# EAGLE board rcp2pads (EAGLE 9.6.2)
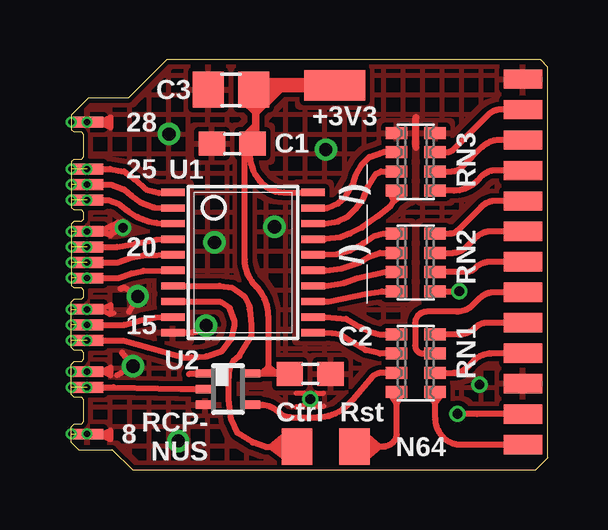
[diagram p0: board, top side]
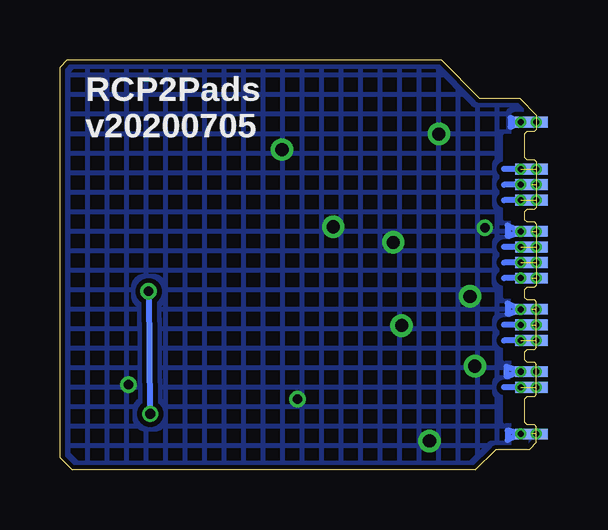
[diagram p1: board, bottom side, seen from below]

Size 19.85 x 17.1 mm. Coordinates in mm from the lower left corner, seen from the top.
Outline: 0,1.15 0.3,0.85 1.7,0.85 2.55,0 19.35,0 19.85,0.5 19.85,16.8 19.55,17.1 3.98,17.1 2.38,15.5 0.7,15.5 0,14.8 0,14.2 0.1,14.1 0.4,14.1 0.5,14 0.5,13.05 0.4,12.95 0.1,12.95 0,12.85 0,10.95 0.1,10.85 0.4,10.85 0.5,10.75 0.5,10.45 0.4,10.35 0.1,10.35 0,10.25 0,7.7 0.1,7.6 0.4,7.6 0.5,7.5 0.5,7.2 0.4,7.1 0.1,7.1 0,7 0,5.1 0.1,5 0.4,5 0.5,4.9 0.5,4.6 0.4,4.5 0.1,4.5 0,4.4 0,3.15 0.1,3.05 0.4,3.05 0.5,2.95 0.5,2 0.4,1.9 0.1,1.9 0,1.8 0,1.15
Copper layers (1*16): Top 0.018mm / dielectric 1.55mm / Bottom 0.018mm
Design rules "fpc": minimum track width 0.1mm, minimum drill 0.2mm, track to track 0.2mm, track to pad 0.2mm, pad to pad 0.2mm, via to via 0.2mm, smd to smd 0mil, copper to edge 0.2mm, drill to drill 0.2mm, minimum pad ring 0.125mm, minimum via ring 0.1mm, stop-mask expansion 2mil, vias tented up to drill 1mm, thermal gap 0.2mm
bRestrict: area -0.4,10.4 to 1.3,14; area -0.4,7.2 to 1.3,9.5; area -0.4,4.6 to 1.3,6.2; area -0.4,2 to 1.3,3.6

## Footprints (pad centres in the part's own frame; a part is rotated, then mirrored left to right if it is on the bottom)
C0603 = smd 1.1 x 1: 1 -0.85,0; 2 0.85,0
C0805 = smd 1.3 x 1.5: 1 -0.95,0; 2 0.95,0
SMD0.8SQ = smd 1.27 x 1.524: P$1 0,0
SMD0,45-1,35 = smd 1.35 x 0.45: P$1 0,0
SMD0,8-1,6 = smd 0.8 x 1.6: 1 0,0
SMD1,27-2,54 = smd 1.27 x 2.54: 1 0,0
CTS742C083 = smd 0.5 x 0.9: 1 -1.2,-0.8; 2 -0.4,-0.8; 3 0.4,-0.8; 4 1.2,-0.8; 5 1.2,0.8; 6 0.4,0.8; 7 -0.4,0.8; 8 -1.2,0.8
TSSOP20 = smd 0.305 x 0.991: 1 -2.925,-2.918; 2 -2.275,-2.918; 3 -1.625,-2.918; 4 -0.975,-2.918; 5 -0.325,-2.918; 6 0.325,-2.918; 7 0.975,-2.918; 8 1.625,-2.918; 9 2.275,-2.918; 10 2.925,-2.918; 11 2.925,2.918; 12 2.275,2.918; 13 1.625,2.918; 14 0.975,2.918; 15 0.325,2.918; 16 -0.325,2.918; 17 -0.975,2.918; 18 -1.625,2.918; 19 -2.275,2.918; 20 -2.925,2.918
DCK_R-PDSO-G5 = smd 0.35 x 0.8: 1 -0.65,-0.95; 2 0,-0.95; 3 0.65,-0.95; 4 0.65,0.95; 5 -0.65,0.95

## Placement (x,y rotation side)
C1  0.1u  [C0603]  6.7,13.6 180 top
C2  0.1u  [C0603]  9.95,4 0 top
C3  22u  [C0805]  6.65,15.85 180 top
E$2  [SMD0.8SQ]  9.4,0.98 0 top
E$6  [SMD0.8SQ]  11.8,0.98 0 top
E$8  [SMD0,45-1,35]  0.65,3.45 0 top
E$9  [SMD0,45-1,35]  0.65,4.1 0 top
E$10  [SMD0,45-1,35]  0.65,5.4 0 top
E$11  [SMD0,45-1,35]  0.65,6.05 0 top
E$12  [SMD0,45-1,35]  0.65,6.7 0 top
E$13  [SMD0,45-1,35]  0.65,8 0 top
E$14  [SMD0,45-1,35]  0.65,8.65 0 top
E$15  [SMD0,45-1,35]  0.65,9.3 0 top
E$16  [SMD0,45-1,35]  0.65,9.95 0 top
E$17  [SMD0,45-1,35]  0.65,11.25 0 top
E$18  [SMD0,45-1,35]  0.65,11.9 0 top
E$19  [SMD0,45-1,35]  0.65,12.55 0 top
E$20  [SMD0,8-1,6]  18.81,15.03 90 top
E$21  [SMD0,8-1,6]  18.81,16.3 90 top
E$22  [SMD0,45-1,35]  0.2,12.55 0 bottom
E$23  [SMD0,45-1,35]  0.2,11.9 0 bottom
E$24  [SMD0,45-1,35]  0.2,11.25 0 bottom
E$25  [SMD0,45-1,35]  0.2,9.95 0 bottom
E$26  [SMD0,45-1,35]  0.2,9.3 0 bottom
E$27  [SMD0,45-1,35]  0.2,8.65 0 bottom
E$28  [SMD0,45-1,35]  0.2,8 0 bottom
E$29  [SMD0,45-1,35]  0.2,6.7 0 bottom
E$30  [SMD0,45-1,35]  0.2,6.05 0 bottom
E$31  [SMD0,45-1,35]  0.2,5.4 0 bottom
E$32  [SMD0,45-1,35]  0.2,4.1 0 bottom
E$33  [SMD0,45-1,35]  0.2,3.45 0 bottom
E$36  [SMD0,8-1,6]  18.81,13.76 90 top
E$39  [SMD0,8-1,6]  18.81,12.49 90 top
E$43  [SMD0,45-1,35]  0.2,1.5 0 bottom
E$46  [SMD0,45-1,35]  0.65,14.5 0 top
E$47  [SMD0,45-1,35]  0.2,14.5 0 bottom
E$48  [SMD0,8-1,6]  18.81,11.22 90 top
E$49  [SMD0,8-1,6]  18.81,9.95 90 top
E$50  [SMD0,8-1,6]  18.81,8.68 90 top
E$51  [SMD0,8-1,6]  18.81,7.41 90 top
E$53  [SMD0,8-1,6]  18.81,6.14 90 top
E$54  [SMD0,8-1,6]  18.81,4.87 90 top
E$55  [SMD0,8-1,6]  18.81,3.6 90 top
E$56  [SMD0,8-1,6]  18.81,2.33 90 top
E$57  [SMD0,8-1,6]  18.81,1.06 90 top
GND  [SMD0,45-1,35]  0.65,1.5 0 top
P_VCC_3V3  [SMD1,27-2,54]  10.96,16.04 90 top
RN1  [CTS742C083]  14.35,4.45 270 top
RN2  [CTS742C083]  14.35,8.65 270 top
RN3  [CTS742C083]  14.35,12.85 270 top
U1  74VHC9151FT  [TSSOP20]  7.15,8.65 270 top
U2  SN74LVC1G17DCKR  [DCK_R-PDSO-G5]  6.53,3.38 270 top

## Library data of the parts
C1-C3 = rcl
E$2 E$6 E$8-E$33 E$36 E$39 E$43 E$46-E$51 E$53-E$57 GND = wirepad
P_VCC_3V3 = wirepad@1
RN1-RN3 = resistor-net
U1 = sipex
U2 = texas

## Nets
3V3: C1.1 C2.1 C3.1 P_VCC_3V3.1 U1.20 U2.5
#DSYNC: E$10.P$1 E$31.P$1 U1.8
#DSYNC.1: E$53.1 RN1.8
CTRL: E$2.P$1 U1.7
CTRL.1: E$56.1 RN2.5
D0: E$19.P$1 E$22.P$1 U1.1
D0.1: E$20.1 RN3.7
D1: E$18.P$1 E$23.P$1 U1.2
D1.1: E$36.1 RN3.6
D2: E$17.P$1 E$24.P$1 U1.3
D2.1: E$39.1 RN3.5
D3: E$15.P$1 E$26.P$1 U1.4
D3.1: E$48.1 RN2.8
D4: E$14.P$1 E$27.P$1 U1.5
D4.1: E$49.1 RN2.7
D5: E$13.P$1 E$28.P$1 U1.6
D5.1: E$50.1 RN2.6
D6: E$11.P$1 E$30.P$1 U1.9
D6.1: E$51.1 RN1.7
GND: C1.2 C2.2 C3.2 E$9.P$1 E$12.P$1 E$16.P$1 E$21.1 E$25.P$1 E$29.P$1 E$32.P$1 E$43.P$1 E$46.P$1 E$55.1 GND.P$1 RN3.1 RN3.8 U1.10 U2.3
RST: E$6.P$1 RN1.4
RST.1: E$57.1 RN1.5
S$1: RN3.2 U1.19
S$2: RN3.3 U1.18
S$3: RN3.4 U1.17
S$4: RN2.1 U1.16
S$6: RN2.2 U1.15
S$7: RN2.3 U1.14
S$9: RN1.1 U1.12
S$10: RN2.4 U1.13
S$11: RN1.3 U2.4
S$12: RN1.2 U1.11
VCLK: E$8.P$1 E$33.P$1 U2.2
VCLK.1: E$54.1 RN1.6

## Tracks (layer width: path | path; a pad name or v marks a point on that pad's centre or on a via)
3V3
  Top 0.254: C3.1 7.65,15.85 8.05,15.45 8.05,15.23 7.67,14.85 | C3.1 7.6,15.45 | 7.67,14.85 7.67,15.67 arc45 C3.1 | C1.1 7.42,13.24 arc45 7.95,11.95 arc45 8.86,11.57 U1.20 | 7.67,14.85 7.1,15.42 7.1,15.5 | 7.22,13.23 7.22,8.8 arc45 7.7,7.65 arc-45 8.2,6.44 8.2,4.3 | U2.5 7.9,4.03 | 7.9,4.03 8.2,4.03 | 8.2,4.03 8.55,4.03 | 8.55,4.03 9.07,4.03 C2.1 | 8.2,4.03 8.2,4.3 | 8.2,4.3 7.9,4.03 | 8.2,4.3 8.55,4.03
  Top 0.305: 7.67,14.85 7.67,14.35 | 7.67,14.35 7.67,13.72 C1.1 7.55,13.3 7.22,13.23 | 7.67,14.35 7.27,13.95 7.15,13.95
  Top 0.61: P_VCC_3V3.1 7.79,16.04 C3.1 | 8.05,15.45 8.65,16.05
#DSYNC  (via drill 0.25)  (2 unrouted)
  Top 0.254: E$10.P$1 2.15,5.4 3.2,5.1 4.65,4.7 5,4.7 5.63,4.74 6.28,4.97 6.68,5.5 6.8,6.03 6.8,6.19 6.6,6.75 6.22,7 4.26,7 U1.8
  Bottom 0.254: E$31.P$1 1.34,5.4
  other vias: 0.65,5.4 0,5.4
#DSYNC.1
  Top 0.254: E$53.1 17.31,6.14 arc45 16.85,5.95 arc-45 16.13,5.65 RN1.8
CTRL
  Top 0.254: E$2.P$1 8.75,0.98 | 8.3,0.98 8.75,0.98 | 8.3,0.98 8.07,0.98 7.55,1.15 6.9,1.55 6.65,2.1 6.55,2.95 6.55,3.65 6.6,4.25 6.75,4.55 7,4.75 7.5,5.57 7.5,6.05 7.43,6.71 7.4,6.85 7.2,7.25 6.7,7.6 6.17,7.67 U1.7 | 8.3,0.98 8.81,1.38 | 8.81,1.38 9.1,1.6 | 8.3,0.98 8.81,0.58 | 8.81,0.58 9.05,0.4 | 8.75,0.98 8.81,1.38 | 8.75,0.98 8.81,0.58
CTRL.1  (via drill 0.4)
  Top 0.254: RN2.5 v16.16,7.45 | v16.09,2.34 16.9,2.33 E$56.1
  Bottom 0.254: v16.16,7.45 arc-45 16.14,7.44 v16.09,2.34
D0  (via drill 0.25)  (2 unrouted)
  Top 0.254: E$19.P$1 1.6,12.55 2.2,12.45 2.65,12.1 3.1,11.7 3.45,11.6 3.65,11.55 U1.1
  Bottom 0.254: E$22.P$1 1.34,12.55
  other vias: 0.65,12.55 0,12.55
D0.1
  Top 0.254: RN3.7 15.65,13.25 arc45 15.91,13.36 17.37,14.82 arc-45 17.88,15.03 E$20.1
D1  (via drill 0.25)  (1 unrouted)
  Top 0.254: E$18.P$1 1.65,11.9 2.2,11.7 2.5,11.45 2.9,11.15 3.45,10.95 U1.2
  Bottom 0.127: E$23.P$1 E$18.P$1
  Bottom 0.254: E$23.P$1 1.34,11.9
  other vias: 0.65,11.9 0,11.9
D1.1
  Top 0.254: E$36.1 17.81,13.76 arc45 17.13,13.48 16.28,12.63 arc-45 15.85,12.45 RN3.6
D2  (via drill 0.25)  (2 unrouted)
  Top 0.254: E$17.P$1 1.55,11.25 1.95,11.1 2.35,10.8 2.75,10.55 3.25,10.35 3.55,10.3 U1.3
  Bottom 0.254: E$24.P$1 1.35,11.25
  other vias: 0.65,11.25 0,11.25
D2.1
  Top 0.254: E$39.1 17.64,12.49 arc45 17.13,12.28 16.9,12.05 arc-45 15.93,11.65 RN3.5
D3  (via drill 0.25)  (2 unrouted)
  Top 0.254: E$15.P$1 1.9,9.3 2.7,9.45 3.55,9.6 U1.4
  Bottom 0.254: E$26.P$1 1.35,9.3
  other vias: 0.65,9.3 0,9.3
D3.1
  Top 0.254: E$48.1 17.67,11.22 arc45 17.07,10.97 16.09,9.99 arc-45 15.75,9.85 RN2.8
D4  (via drill 0.25)  (2 unrouted)
  Top 0.254: E$14.P$1 1.9,8.65 2.5,8.85 3,8.95 U1.5
  Bottom 0.254: E$27.P$1 1.34,8.65
  other vias: 0.65,8.65 0,8.65
D4.1
  Top 0.254: E$49.1 17.5,9.95 arc45 16.82,9.67 16.41,9.26 arc-45 15.9,9.05 RN2.7
D5  (via drill 0.25)  (1 unrouted)
  Top 0.254: E$13.P$1 1.95,8 2.5,8.2 3,8.3 U1.6
  Bottom 0.127: E$28.P$1 E$13.P$1
  Bottom 0.254: E$28.P$1 1.36,8
  other vias: 0.65,8 0,8
D5.1
  Top 0.254: E$50.1 17.48,8.68 arc45 16.8,8.4 arc-45 16.44,8.25 RN2.6
D6  (via drill 0.25)  (1 unrouted)
  Top 0.254: E$11.P$1 2.2,6.05 2.95,6.25 3.5,6.35 U1.9
  Bottom 0.127: E$30.P$1 E$11.P$1
  Bottom 0.254: E$30.P$1 1.35,6.05
  other vias: 0.65,6.05 0,6.05
D6.1
  Top 0.254: E$51.1 17.61,7.41 arc45 17.01,7.16 16.73,6.88 arc-45 16.05,6.6 14.8,6.6 arc90 14.33,6.13 14.33,5.17 arc90 14.65,4.85 RN1.7
GND  (via drill 0.25, 0.4, 0.55)  (3 unrouted)
  Top 0.203: 1.65,6.49 1.65,6.9 1.2,6.7 1.65,6.49 | 1.65,6.49 1.77,6.54 | v9.95,2.95 9.7,3.2 9.35,3.2 | v9.95,2.95 10.2,3.2 10.5,3.2 | v9.95,2.95 9.63,2.63 9.35,2.63 | v9.95,2.95 10,2.95 10.31,2.64 10.35,2.64 10.47,2.65 10.54,2.66
  Top 0.254: E$46.P$1 0.33,14.5 | v0,4.1 E$9.P$1 0.33,4.1 | 1.23,4.08 1.28,4.1 | 1.28,4.1 1.62,4.26 1.62,3.95 1.28,4.1 | 1.92,10.3 1.17,9.95 1.62,9.79 1.62,9.8 | 1.92,10.3 1.62,9.8 | U1.10 4.89,5.72 arc45 v5.61,6.03 | 2.1,4.9 v2.56,4.33 1.9,3.95 | 2.4,6.6 v2.76,7.24 2.2,7.6 2.05,7.55 | v2.15,10.1 1.62,9.8 | v2.15,10.1 2.15,10.35 1.92,10.3 | v2.15,10.1 1.92,10.3 | 1.18,14.5 1.62,14.7 1.62,14.29 1.18,14.5 | 1.23,1.46 1.62,1.64 1.62,1.28 1.23,1.46
  Top 0.29: 14.35,13.46 14.35,14.7
  Bottom 0.127: E$25.P$1 E$16.P$1
  Bottom 0.254: 0.7,4.1 1.25,3.91 1.25,4.3 E$9.P$1 | E$12.P$1 1.2,6.95 1.2,6.51 E$12.P$1 | E$16.P$1 1.2,10.2 1.2,9.76 E$16.P$1 | 1.2,1.65 1.2,1.25 GND.P$1 1.2,1.65 | E$46.P$1 1.07,14.69 1.07,14.31 E$46.P$1
  Bottom 0.305: v0,14.5 E$46.P$1
  other vias: 0,9.95 0.65,9.95 0.65,14.5 4.45,1.21 0,1.5 0.65,1.5 0.65,4.1 0.65,6.7 0,6.7 10.6,13.36 5.96,9.49 4.07,14.01 8.46,10.14 17,3.56
  pour Top (no thermals): 148.22,12.19 147,12.85 147,11.58
  pour Bottom (no thermals): 148.12,12.19 146.22,13.22 146.27,12.62 146.22,11.24
  pour Bottom (hatched): 0,14.1 0,17.05 19.8,17.05 19.8,0 0.25,0 0,0 0,14.05
  pour Top (hatched): 0,14.1 0,17.05 19.8,17.05 19.8,0 0.25,0 0,0 0,14.05
RST
  Top 0.254: E$6.P$1 12.55,0.98 | 12.55,0.98 12.82,0.98 | 12.82,0.98 12.2,1.5 12.55,0.98 | 12.82,0.98 12.15,0.4 12.55,0.98 | 12.82,0.98 12.98,0.98 arc45 13.4,1.15 arc45 13.55,1.51 13.55,2.75 | RN1.4 13.55,2.75 | 13.55,2.75 13.85,3.25 | 13.55,2.75 13.25,3.25
RST.1
  Top 0.254: 15.26,3.25 RN1.5 15.15,2.8 | 15.15,2.8 15.15,2.2 arc45 15.5,1.35 arc45 16.2,1.06 E$57.1 | 15.15,2.8 15.45,3.2 | 15.15,2.8 14.85,3.2
S$1
  Top 0.254: U1.19 10.68,10.93 11.1,11.1 11.4,11.38 11.75,11.95 11.85,12.3 12.11,12.75 12.42,13.05 12.99,13.25 RN3.2
S$2
  Top 0.254: U1.18 10.57,10.28 11.1,10.35 11.5,10.55 11.85,10.9 12.15,11.3 12.35,11.8 12.7,12.35 12.9,12.45 RN3.3
S$3
  Top 0.254: U1.17 10.56,9.62 11.2,9.7 11.6,9.85 12.1,10.1 12.8,10.6 13.3,11 13.43,11.21 | 13.43,11.21 13.55,11.4 RN3.4 13.43,11.21 | 13.43,11.21 13.85,11.5 | 13.43,11.21 13.25,11.6
S$4
  Top 0.254: U1.16 10.55,8.98 11.05,9 11.6,9.15 12.15,9.45 12.6,9.75 13,9.85 RN2.1
S$6
  Top 0.254: U1.15 10.59,8.32 11.25,8.4 12,8.65 12.4,8.9 12.85,9.05 RN2.2
S$7
  Top 0.254: U1.14 10.59,7.67 11.35,7.8 11.9,8 13.05,8.25 RN2.3
S$9
  Top 0.254: U1.12 10.57,6.38 11.45,6.3 12.05,5.95 12.45,5.75 12.85,5.65 RN1.1
S$10
  Top 0.254: U1.13 10.72,7.03 12.33,7.35 12.95,7.45 RN2.4
S$11
  Top 0.254: RN1.3 12.91,4.05 arc45 12.55,3.9 11.75,2.95 11.53,2.73 arc-45 10.25,2.2 9.13,2.2 arc-45 8.65,2.4 arc45 7.87,2.73 U2.4
S$12
  Top 0.254: RN1.2 12.85,4.85 12.25,5 11.75,5.3 11.2,5.65 10.85,5.7 U1.11
S$13
  Top 0.254: 5.65,4 4.9,4
VCLK  (via drill 0.25)  (2 unrouted)
  Top 0.254: E$8.P$1 1.75,3.45 4.55,3.38 U2.2
  Bottom 0.254: E$33.P$1 1.35,3.45
  other vias: 0.65,3.45 0,3.45
VCLK.1
  Top 0.254: RN1.6 15.95,4.05 arc45 16.46,4.26 16.75,4.55 arc-45 17.52,4.87 E$54.1

## Text on the board
tPlace: 28 | +3V3 | 25 | RN3 | 20 | RN2 | 15 | RN1 | Ctrl | Rst | 8 | RCP- / NUS | N64
tNames: __/)__/)_
bNames: RCP2Pads / v20200705